# Altium PCB car_pcb.PcbDoc
Units mil, origin at the board's own origin, x right, y up, seen from the top; angles counter-clockwise.
Board outline 3310 x 3445 mil, 2 copper layers (Top Layer, Bottom Layer); 26 components, 45 nets, 159 pads, 0 vias.
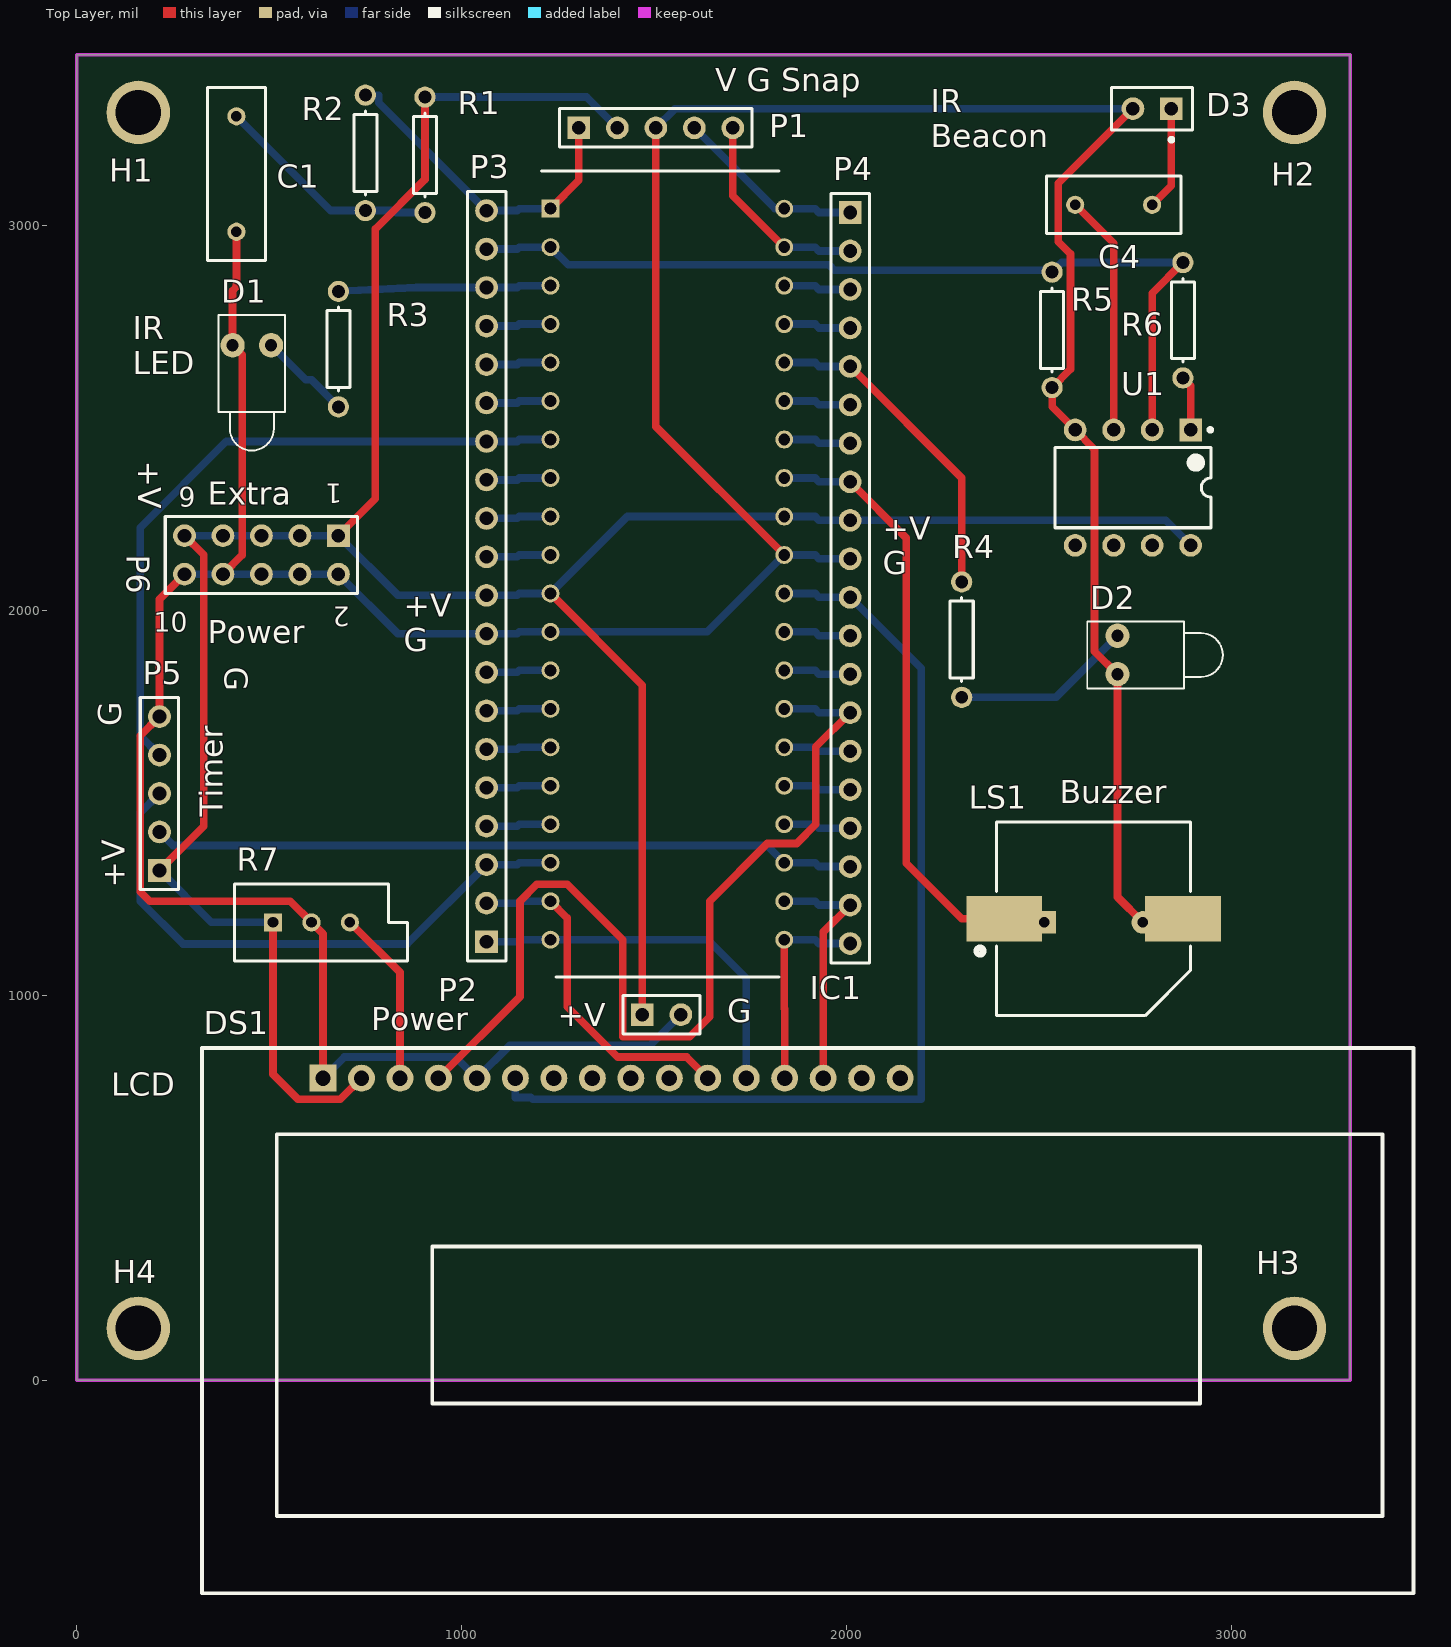
[diagram p0: Top Layer view]
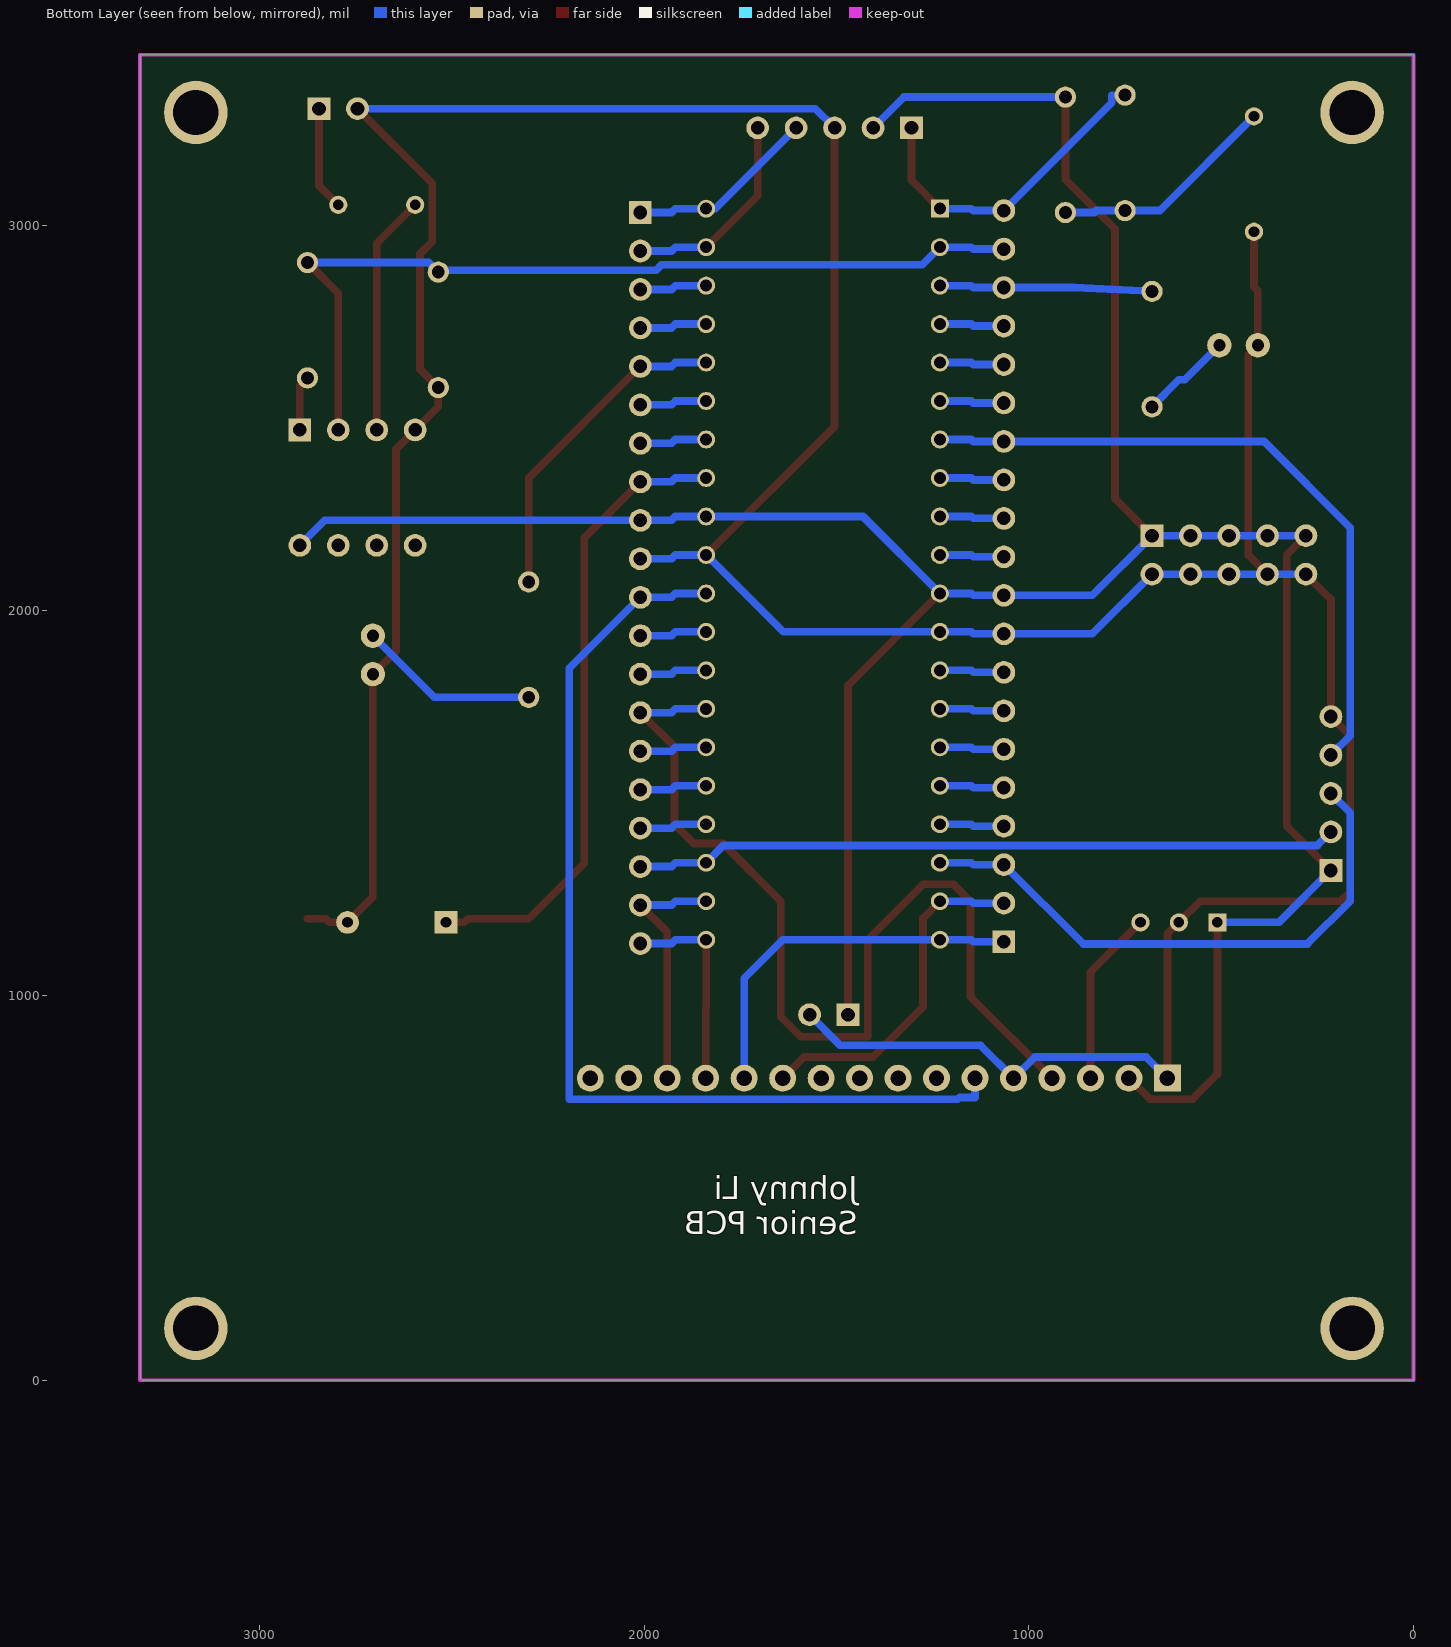
[diagram p1: Bottom Layer view, seen from below]

## Layer stack, top to bottom
Top Solder: solder mask 0.4, Solder Resist, Dk 3.5
Top Layer: signal copper 1.4
Dielectric 1: dielectric 12.6, FR-4, Dk 4.8
Bottom Layer: signal copper 1.4
Bottom Solder: solder mask 0.4, Solder Resist, Dk 3.5

## Board outline
0,0 3305,0 3310,5 3310,3445 0,3445

## Design rules (kind name [scope] priority, off if disabled: settings)
Clearance [All] p1: gap=10 ignorepadtopadclearanceinfootprint=FALSE except(0: Arc-Hole Track-Hole SMDPad-Hole THPad-Hole Via-Hole Fill-Hole Poly-Hole Region-Hole Text-Hole)
PolygonConnect [All] p1: connectstyle=Relief reliefconductorwidth=10 reliefentries=4 polygonreliefangle="90 Angle" airgapwidth=10
RoutingVias [All] p1: holewidth=28 width=50 viastyle="Through Hole" minholewidth=28 minwidth=50 maxholewidth=28 maxwidth=50
SolderMaskExpansion [All] p1: expansion=4 istentingtop=FALSE
Width [All] p1: maxlimit=20 minlimit=20 preferedwidth=20 minimp=50.000000 maximp=50.000000 favimp=50.000000
30 further rules are at their usual default settings.

## Components (designator, comment, footprint, x,y, rotation, side; value= is the part's Value field where it differs from the comment)
C1 "Cap" RAD-0.3 415,3135 r90 top value=0.1uF
C4 "Cap Pol1" RAD-0.2 2695,3055 r180 top value=270uF
D1 "LED1" LED-1 455,2690 r270 top
D2 "LED1" LED-1 2705,1885 r0 top
D3 "Photo Sen" PIN2 2845,3305 r180 top
DS1 "LCD 44780" "OLED 16x2" 640,785 r0 top
H1 "Hole 3mm" "Hole 3mm"#1 285,3295 r0 top
H2 "Hole 3mm" "Hole 3mm"#1 3290,3295 r0 top
H3 "Hole 3mm" "Hole 3mm"#2 3645,-400 r0 top
H4 "Hole 3mm" "Hole 3mm"#3 170,135 r0 top
IC1 "PIC18F47K40-I_P" DIP1543W58P254L5175H635Q40N 1535,2095 r0 top
LS1 "Buzzer" ABSM-1574 2410.67,1199.45 r0 top
P1 "Header 5" HDR1X5 1305,3255 r0 top
P2 "Header 2" HDR1X2 1470,950 r0 top
P3 "Header 20" HDR1X20 1065,1140 r90 top
P4 "Header 20" HDR1X20 2010,3035 r270 top
P5 "Header 5" HDR1X5 215,1325 r90 top
P6 "Header 5X2" HDR2X5 680,2195 r180 top
R1 "Res1" AXIAL-0.3 905,3185 r270 top value=10K
R2 "Res1" AXIAL-0.3 750,3190 r90 top value=410
R3 "Res1" AXIAL-0.3 680,2680 r270 top value=1K
R4 "Res1" AXIAL-0.3 2300,1925 r270 top value=1K
R5 "Res1" AXIAL-0.3 2535,2730 r270 top value=1K
R6 "Res1" AXIAL-0.3 2875,2755 r90 top value=22K
R7 "RPot" VR5 610,1190 r0 top value=2M
U1 "LT1632CN8" DIP-8 2745,2320 r270 top

## Footprints (in the part's own frame and the unit in brackets; to place one, negate y for a bottom-side part, rotate by r counter-clockwise, add the part's x,y. Pads: shape width x height; smd on the part's side, far side on the other; paste and mask are expansions set on the pad)
ABSM-1574 [mm] "Magnetic Transducer Buzzer"
  rect 5x3 smd: 1(0,0) 2(11.8,0)
  rect 1.5x1.5 hole 0.7: 1A(2.65,-0.24)
  round 1.5 hole 0.7: 2A(9.15,-0.24)
  silkscreen extent -1.83,-6.4 12.3,6.4
AXIAL-0.3 [mm] "Axial Device, Thru-Hole; 2 Leads; 0.3 in Pin Spacing"
  round 1.4 hole 0.85: 1(-3.81,0) 2(3.81,0)
  silkscreen extent -2.77,-0.76 2.77,0.76
DIP1543W58P254L5175H635Q40N [mm]
  rect 1.184x1.184 hole 0.784: 1(-7.715,24.13)
  round 1.184 hole 0.784: 2(-7.715,21.59) 3(-7.715,19.05) 4(-7.715,16.51) 5(-7.715,13.97) 6(-7.715,11.43) 7(-7.715,8.89) 8(-7.715,6.35) 9(-7.715,3.81) 10(-7.715,1.27) 11(-7.715,-1.27) 12(-7.715,-3.81) 13(-7.715,-6.35) 14(-7.715,-8.89) 15(-7.715,-11.43) 16(-7.715,-13.97) 17(-7.715,-16.51) 18(-7.715,-19.05) 19(-7.715,-21.59) 20(-7.715,-24.13) 21(7.715,-24.13) 22(7.715,-21.59) 23(7.715,-19.05) 24(7.715,-16.51) 25(7.715,-13.97) 26(7.715,-11.43) 27(7.715,-8.89) 28(7.715,-6.35) 29(7.715,-3.81) 30(7.715,-1.27) 31(7.715,1.27) 32(7.715,3.81) 33(7.715,6.35) 34(7.715,8.89) 35(7.715,11.43) 36(7.715,13.97) 37(7.715,16.51) 38(7.715,19.05) 39(7.715,21.59) 40(7.715,24.13)
  silkscreen extent -8.31,-26.61 7.37,26.61, body extent -7.86,-25.88 7.86,25.88, height 6.35
DIP-8 [mm] "DIP; 8 Leads; Row Spacing 7.62 mm; Pitch 2.54 mm"
  rect 1.5x1.5 hole 0.9: 1(-3.81,3.81)
  round 1.5 hole 0.9: 2(-3.81,1.27) 3(-3.81,-1.27) 4(-3.81,-3.81) 5(3.81,-3.81) 6(3.81,-1.27) 7(3.81,1.27) 8(3.81,3.81)
  silkscreen extent -3.93,-5.15 2.65,5.24, body extent -3.6,-5.15 3.6,5.15, height 5.08
HDR1X2 [mm] "Connector; Header; 2 Position"
  rect 1.5x1.5 hole 0.9: 1(0,0)
  round 1.5 hole 0.9: 2(2.54,0)
  silkscreen extent -1.27,-1.27 3.81,1.27
HDR1X5 [mm] "Connector; Header; 5 Position"
  rect 1.5x1.5 hole 0.9: 1(0,0)
  round 1.5 hole 0.9: 2(2.54,0) 3(5.08,0) 4(7.62,0) 5(10.16,0)
  silkscreen extent -1.27,-1.27 11.43,1.27
HDR1X20 [mm] "Connector; Header; 20 Position"
  rect 1.5x1.5 hole 0.9: 1(0,0)
  round 1.5 hole 0.9: 2(2.54,0) 3(5.08,0) 4(7.62,0) 5(10.16,0) 6(12.7,0) 7(15.24,0) 8(17.78,0) 9(20.32,0) 10(22.86,0) 11(25.4,0) 12(27.94,0) 13(30.48,0) 14(33.02,0) 15(35.56,0) 16(38.1,0) 17(40.64,0) 18(43.18,0) 19(45.72,0) 20(48.26,0)
  silkscreen extent -1.27,-1.27 49.53,1.27
HDR2X5 [mm] "Connector; Header; 5x2 Position"
  rect 1.5x1.5 hole 0.9: 1(0,0)
  round 1.5 hole 0.9: 2(0,2.54) 3(2.54,0) 4(2.54,2.54) 5(5.08,0) 6(5.08,2.54) 7(7.62,0) 8(7.62,2.54) 9(10.16,0) 10(10.16,2.54)
  silkscreen extent -1.27,-1.27 11.43,3.81
"Hole 3mm"#1 [mil]
  round 165 hole 118.11: 1(-125,0)
"Hole 3mm"#2 [mil]
  round 165 hole 118.11: 1(-480,535)
"Hole 3mm"#3 [mil]
  round 165 hole 118.11: 1(-10,0)
LED-1 [mm] "LED; 2 Leads"
  round 1.6 hole 0.8: 1(0,1.27) 2(0,-1.27)
  silkscreen extent -2,-2.2 6.95,2.2
"OLED 16x2" [mil]
  rect 70x70 hole 40: 1(0,0)
  round 70 hole 40: 2(100,0) 3(200,0) 4(300,0) 5(400,0) 6(500,0) 7(600,0) 8(700,0) 9(800,0) 10(900,0) 11(1000,0) 12(1100,0) 13(1200,0) 14(1300,0) 15(1400,0) 16(1500,0)
  silkscreen extent -315,-1339 2835,79
PIN2 [mm] "Photosensitive Diode; 2 Leads"
  rect 1.5x1.5 hole 0.9: 1(0,0)
  round 1.5 hole 0.9: 2(2.54,0)
  silkscreen extent -1.4,-1.4 3.94,2.17
RAD-0.2 [mm] "Radial Cap, Thru-Hole; 2 Leads; 0.2 in Pin Spacing"
  round 1.2 hole 0.7: 1(-2.54,0) 2(2.54,0)
  silkscreen extent -4.44,-1.91 4.44,1.91
RAD-0.3 [mm] "Radial Cap, Thru-Hole; 2 Leads; 0.3 in Pin Spacing"
  round 1.2 hole 0.7: 1(-3.81,0) 2(3.81,0)
  silkscreen extent -5.71,-1.91 5.71,1.91
VR5 [mm] "Thru-Hole; 3 Leads"
  rect 1.2x1.2 hole 0.7: 1(-2.54,0)
  round 1.2 hole 0.7: 2(0,0) 3(2.54,0)
  silkscreen extent -5.08,-2.54 6.35,2.54

## Part data
C1: "Capacitor", LatestRevisionDate=17-Jul-2002, LatestRevisionNote="Re-released for DXP Platform.", PackageDescription="Radial Cap, Thru-Hole; 2 Leads; 0.3 in Pin Spacing", PackageReference=RAD-0.3, Published=8-Jun-2000, Publisher="Altium Limited"
C4: "Polarized Capacitor (Radial)", LatestRevisionDate=17-Jul-2002, LatestRevisionNote="Re-released for DXP Platform.", PackageDescription="Polarized Capacitor (Radial); 2 Leads", PackageReference=RB7.6-15, Published=8-Jun-2000, Publisher="Altium Limited"
D1 D2: "Typical RED GaAs LED", LatestRevisionDate=08-Jul-2005, LatestRevisionNote="Mech Layer 1 removed.", PackageDescription="LED; 2 Leads", PackageReference=LED-1, Published=8-Jun-2000, Publisher="Altium Limited"
D3: "Photosensitive Diode", LatestRevisionDate=17-Jul-2002, LatestRevisionNote="Re-released for DXP Platform.", PackageReference=PIN2, Published=24-Mar-1999, Publisher="Altium Limited"
IC1: "Integrated Circuit", Manufacturer_Name=Microchip, Manufacturer_Part_Number=PIC18F47K40-I/P, Mouser Part Number=579-PIC18F47K40-I/P, RS Part Number=1262152P, Datasheet Link=https://componentsearchengine.com/Datasheets/2/PIC18F47K40-I_P.pdf, Height=6.35mm, Mouser Price/Stock=https://www.mouser.com/Search/Refine.aspx?Keyword=579-PIC18F47K40-I%2FP, RS Price/Stock=http://uk.rs-online.com/web/p/products/1262152P
LS1: "Magnetic Transducer Buzzer", ComponentLink1Description="Manufacturer Link", ComponentLink1URL=http://www.megastar.com/linecard/buzzmode/index.php, DatasheetVersion=17-Dec-2003, LatestRevisionDate=17-Dec-2003, LatestRevisionNote="Schematic revised, PCB Footprint replaced.", PackageDescription="Magnetic Transducer Buzzer", PackageReference=ABSM-1574, Published=24-Mar-1999, Publisher="Altium Limited"
P1 P5: "Header, 5-Pin", LatestRevisionDate=17-Jul-2002, LatestRevisionNote="Re-released for DXP Platform.", Publisher="Altium Limited"
P2: "Header, 2-Pin", LatestRevisionDate=17-Jul-2002, LatestRevisionNote="Re-released for DXP Platform.", Publisher="Altium Limited"
P3 P4: "Header, 20-Pin", LatestRevisionDate=17-Jul-2002, LatestRevisionNote="Re-released for DXP Platform.", Publisher="Altium Limited"
P6: "Header, 5-Pin, Dual row", LatestRevisionDate=17-Jul-2002, LatestRevisionNote="Re-released for DXP Platform.", Publisher="Altium Limited"
R1 R2 R3 R4 R5 R6: "Resistor", LatestRevisionDate=17-Jul-2002, LatestRevisionNote="Re-released for DXP Platform.", PackageDescription="Axial Device, Thru-Hole; 2 Leads; 0.3 in Pin Spacing", PackageReference=AXIAL-0.3, Published=8-Jun-2000, Publisher="Altium Limited"
R7: "Potentiometer", LatestRevisionDate=17-Jul-2002, LatestRevisionNote="Re-released for DXP Platform.", PackageDescription="Variable Resistor, Thru-Hole; 3 Leads", PackageReference=VR5, Published=8-Jun-2000, Publisher="Altium Limited", Set Position=0.5, Sim Note="Enter the Resistance value and the set point into parameter fields."
U1: "45MHz, 45V/µs, Dual Rail-to-Rail Input and Output Precision Operational Amplifier", ComponentLink1Description="Manufacturer Link", ComponentLink1URL=http://www.linear.com/, ComponentLink2Description=Datasheet, ComponentLink2URL=http://www.linear.com/pc/downloadDocument.do?navId=H0,C1,C1154,C1009,C1022,P1642,D3055, DatasheetVersion=1996, LatestRevisionDate=29-May-2009, LatestRevisionNote="Component Body Added.", Note=1455, PackageDescription="DIP, Plastic, 8-Pin, Row Spacing 7.62 mm, Pitch 2.54 mm", PackageReference=N8, PackageVersion="N8 1002", Published=8-Jun-2000, Publisher="Altium Limited"

## Nets (pads, with @x,y where several pads share a name; then routed paths per layer and width w, separated by ;. In a path a pad name is that pad's centre, name@x,y a point inside that pad or via, vN(x,y) a via of type N, cw(c..) or ccw(c..) an arc to the next point about the centre after c; other vN are vias at no path point)
+5: DS1.2 IC1.11 IC1.32 P1.2 P2.1 P3.10 P4.9 P5.1 P6.1 P6.3 P6.5 P6.7 P6.9 R1.1 R7.1 U1.8 | length 7719.4
  Top Layer w20: P5.1 330,1440 330,2145 P6.9 ; R7.1 510,795 575,730 685,730 DS1.2 ; P6.1 776,2291 776,2992 905,3121 R1.1 ; IC1.11 1470,1806.26 P2.1
  Bottom Layer w20: P5.1 350,1190 R7.1 ; P6.9 P6.7 P6.5 P6.3 P6.1 835,2040 P3.10 1145,2040 1150,2045 IC1.11 1431.26,2245 IC1.32 1919,2245 1929,2235 P4.9 2830,2235 U1.8 ; R1.1 1325,3335 P1.2
GND: C1.1 D1.2 D2.2 D3.2 DS1.1 DS1.5 IC1.12 IC1.31 LS1.2 LS1.2A P1.3 P2.2 P3.9 P4.10 P5.5 P6.2 P6.4 P6.6 P6.8 P6.10 R5.2 R7.2 U1.4 | length 10563.6
  Top Layer w20: P6.10 215,2030 P5.5 165,1675 165,1270 190,1245 555,1245 R7.2 640,1160 DS1.1 ; P6.8 430,2145 430,2665 D1.2 405,2832 415,2842 C1.1 ; P1.3 1505,2478.74 IC1.31 ; D3.2 2551,3111 2551,2959.56 2582.56,2928 2582.56,2627.56 R5.2 2535,2530 U1.4 2645,2420 2645,1895 D2.2 2705,1255.91 LS1.2A 2818,1190 2827.45,1199.45 LS1.2
  Bottom Layer w20: P6.10 P6.8 P6.6 P6.4 P6.2 835,1940 P3.9 1145,1940 1150,1945 IC1.12 1638.74,1945 IC1.31 1919,2145 1929,2135 P4.10 ; DS1.1 695,840 985,840 DS1.5 1126,871 1491,871 P2.2 ; P1.3 1555,3305 D3.2
NetC1_2: C1.2 R1.2 R2.1 | length 593.6
  Bottom Layer w20: C1.2 660,3040 R2.1 825,3040 830,3035 R1.2
NetC4_1: C4.1 D3.1 | length 270.7
  Top Layer w20: C4.1 2845,3105 D3.1
NetC4_2: C4.2 U1.3 | length 626.4
  Top Layer w20: C4.2 2695,2955 U1.3
NetD1_1: D1.1 R3.2 | length 241.3
  Bottom Layer w20: D1.1 595,2600 610,2600 R3.2
NetD2_1: D2.1 R4.2 | length 471.3
  Bottom Layer w20: R4.2 2545,1775 D2.1
NetDS1_3: DS1.3 R7.3 | length 458.8
  Top Layer w20: R7.3 840,1060 DS1.3
NetDS1_4: DS1.4 IC1.27 P4.14 | length 2553.3
  Top Layer w20: DS1.4 1152,997 1152,1245 1196,1289 1275,1289 1419,1145 1419,893 1593,893 1645,945 1645,1245 1795,1395 1871,1395 1921,1445 1921,1646 P4.14
  Bottom Layer w20: IC1.27 1919,1745 1929,1735 P4.14
NetDS1_6: DS1.6 IC1.30 P4.11 | length 2664.1
  Bottom Layer w20: DS1.6 1140,735 1180,735 1185,730 2195,730 2195,1850 P4.11 1929,2035 1919,2045 IC1.30
NetDS1_11: DS1.11 IC1.19 P3.2 | length 902.5
  Top Layer w20: IC1.19 1275,1201.26 1275,971 1406,840 1585,840 DS1.11
  Bottom Layer w20: P3.2 1145,1240 1150,1245 IC1.19
NetDS1_12: DS1.12 IC1.20 P3.1 | length 978.5
  Bottom Layer w20: P3.1 1145,1140 1150,1145 IC1.20 1640,1145 1740,1045 DS1.12
NetDS1_13: DS1.13 IC1.21 P4.20 | length 535.9
  Top Layer w20: IC1.21 1838.74,966.26 1840,965 DS1.13
  Bottom Layer w20: IC1.21 1919,1145 1929,1135 P4.20
NetDS1_14: DS1.14 IC1.22 P4.19 | length 654.4
  Top Layer w20: DS1.14 1940,1165 P4.19
  Bottom Layer w20: IC1.22 1919,1245 1929,1235 P4.19
NetIC1_1: IC1.1 P1.1 P3.20 R2.2 | length 859.9
  Top Layer w20: IC1.1 1305,3118.74 P1.1
  Bottom Layer w20: R2.2 785,3340 785,3320 P3.20 1145,3040 1150,3045 IC1.1
NetIC1_2: IC1.2 P3.19 R5.1 R6.2 U1.2 | length 2320.4
  Top Layer w20: U1.2 2795,2825 R6.2
  Bottom Layer w20: P3.19 1145,2940 1150,2945 IC1.2 1277.26,2899 1955,2899 1969,2885 2535,2885 R5.1 2560,2905 R6.2
NetIC1_3: IC1.3 P3.18 R3.1 | length 553.6
  Bottom Layer w20: R3.1 883,2840 P3.18 1145,2840 1150,2845 IC1.3
NetIC1_4: IC1.4 P3.17 | length 168.3
  Bottom Layer w20: P3.17 1145,2740 1150,2745 IC1.4
NetIC1_5: IC1.5 P3.16 | length 168.3
  Bottom Layer w20: P3.16 1145,2640 1150,2645 IC1.5
NetIC1_6: IC1.6 P3.15 | length 168.3
  Bottom Layer w20: P3.15 1145,2540 1150,2545 IC1.6
NetIC1_7: IC1.7 P3.14 P5.4 | length 1772.8
  Bottom Layer w20: P5.4 165,1675 165,2216 389,2440 P3.14 1145,2440 1150,2445 IC1.7
NetIC1_8: IC1.8 P3.13 | length 168.3
  Bottom Layer w20: P3.13 1145,2340 1150,2345 IC1.8
NetIC1_9: IC1.9 P3.12 | length 168.3
  Bottom Layer w20: P3.12 1145,2240 1150,2245 IC1.9
NetIC1_10: IC1.10 P3.11 | length 168.3
  Bottom Layer w20: P3.11 1145,2140 1150,2145 IC1.10
NetIC1_13: IC1.13 P3.8 | length 168.3
  Bottom Layer w20: P3.8 1145,1840 1150,1845 IC1.13
NetIC1_14: IC1.14 P3.7 | length 168.3
  Bottom Layer w20: P3.7 1145,1740 1150,1745 IC1.14
NetIC1_15: IC1.15 P3.6 | length 168.3
  Bottom Layer w20: P3.6 1145,1640 1150,1645 IC1.15
NetIC1_16: IC1.16 P3.5 | length 168.3
  Bottom Layer w20: P3.5 1145,1540 1150,1545 IC1.16
NetIC1_17: IC1.17 P3.4 | length 168.3
  Bottom Layer w20: P3.4 1145,1440 1150,1445 IC1.17
NetIC1_18: IC1.18 P3.3 P5.3 | length 1500.3
  Bottom Layer w20: P5.3 165,1475 165,1245 276,1134 859,1134 P3.3 1145,1340 1150,1345 IC1.18
NetIC1_23: IC1.23 P4.18 P5.2 | length 1832.3
  Bottom Layer w20: P5.2 250,1390 1793.74,1390 IC1.23 1919,1345 1929,1335 P4.18
NetIC1_24: IC1.24 P4.17 | length 175.4
  Bottom Layer w20: IC1.24 1919,1445 1929,1435 P4.17
NetIC1_25: IC1.25 P4.16 | length 175.4
  Bottom Layer w20: IC1.25 1919,1545 1929,1535 P4.16
NetIC1_26: IC1.26 P4.15 | length 175.4
  Bottom Layer w20: IC1.26 1919,1645 1929,1635 P4.15
NetIC1_28: IC1.28 P4.13 | length 175.4
  Bottom Layer w20: IC1.28 1919,1845 1929,1835 P4.13
NetIC1_29: IC1.29 P4.12 | length 175.4
  Bottom Layer w20: IC1.29 1919,1945 1929,1935 P4.12
NetIC1_33: IC1.33 LS1.1 LS1.1A P4.8 | length 1650
  Top Layer w20: P4.8 2156,2189 2156,1343.45 2300,1199.45 LS1.1 2458,1199.45 2467.45,1190 LS1.1A
  Bottom Layer w20: IC1.33 1919,2345 1929,2335 P4.8
NetIC1_34: IC1.34 P4.7 | length 175.4
  Bottom Layer w20: IC1.34 1919,2445 1929,2435 P4.7
NetIC1_35: IC1.35 P4.6 | length 175.4
  Bottom Layer w20: IC1.35 1919,2545 1929,2535 P4.6
NetIC1_36: IC1.36 P4.5 R4.1 | length 855.5
  Top Layer w20: P4.5 2300,2345 R4.1
  Bottom Layer w20: IC1.36 1919,2645 1929,2635 P4.5
NetIC1_37: IC1.37 P4.4 | length 175.4
  Bottom Layer w20: IC1.37 1919,2745 1929,2735 P4.4
NetIC1_38: IC1.38 P4.3 | length 175.4
  Bottom Layer w20: IC1.38 1919,2845 1929,2835 P4.3
NetIC1_39: IC1.39 P1.5 P4.2 | length 540.8
  Top Layer w20: P1.5 1705,3078.74 IC1.39
  Bottom Layer w20: IC1.39 1919,2945 1929,2935 P4.2
NetIC1_40: IC1.40 P1.4 P4.1 | length 496.1
  Bottom Layer w20: P1.4 1815,3045 IC1.40 1919,3045 1929,3035 P4.1
NetR6_1: R6.1 U1.1 | length 143.3
  Top Layer w20: R6.1 2895,2585 U1.1
pads on no net: DS1.7 DS1.8 DS1.9 DS1.10 DS1.15 DS1.16 H1.1 H2.1 H3.1 H4.1 U1.5 U1.6 U1.7

## Keep-outs
Keep-Out Layer:
  lines w10: 3305,0 0,0 0,3445 3310,3445 3310,5 3310,0

## Silkscreen, mask and mechanical layers (free items; w line width, h text height)
Top Overlay:
  text "V G Snap" at 1660,3349.99 h60
  text "IR / Beacon" at 2220,3205 h60
  text "IR / LED" at 145,2615 h60
  text "+V" at 160,2390 h60 r270
  text "+V / G" at 2095,2095 h60
  text "Extra /  /  /  / Power" at 340,1915 h60
  text "+V / G" at 850,1895 h60
  text "G" at 385,1855 h60 r270
  text "G" at 115,1700 h60 r90
  text "Buzzer" at 2555,1500 h60
  text "Timer" at 380,1465 h60 r90
  text "+V" at 125,1280 h60 r90
  text "G" at 1690,930 h60
  text "+V" at 1250,920 h60
  text "Power" at 765,910 h60
  text "LCD" at 90,740 h60
Bottom Overlay:
  text "Johnny Li / Senior PCB" at 1445,380 h60

## Text inside footprints (layer, text, board x,y; h text height)
P6: Top Overlay "2" at 710,2010 h50 r180; Top Overlay "1" at 690,2330 h50 r180; Top Overlay "9" at 265,2270 h50; Top Overlay "10" at 200,1945 h50